# Altium PCB PCB1.PcbDoc (part 3 of 3)
Units mil, origin at the board's own origin, x right, y up, seen from the top; angles counter-clockwise.
Board outline 7874.02 x 3937.01 mil, 2 copper layers (Top Layer, Bottom Layer); 455 components, 299 nets, 1238 pads, 79 vias.
Unrouted connection lines stored in the file: 632.
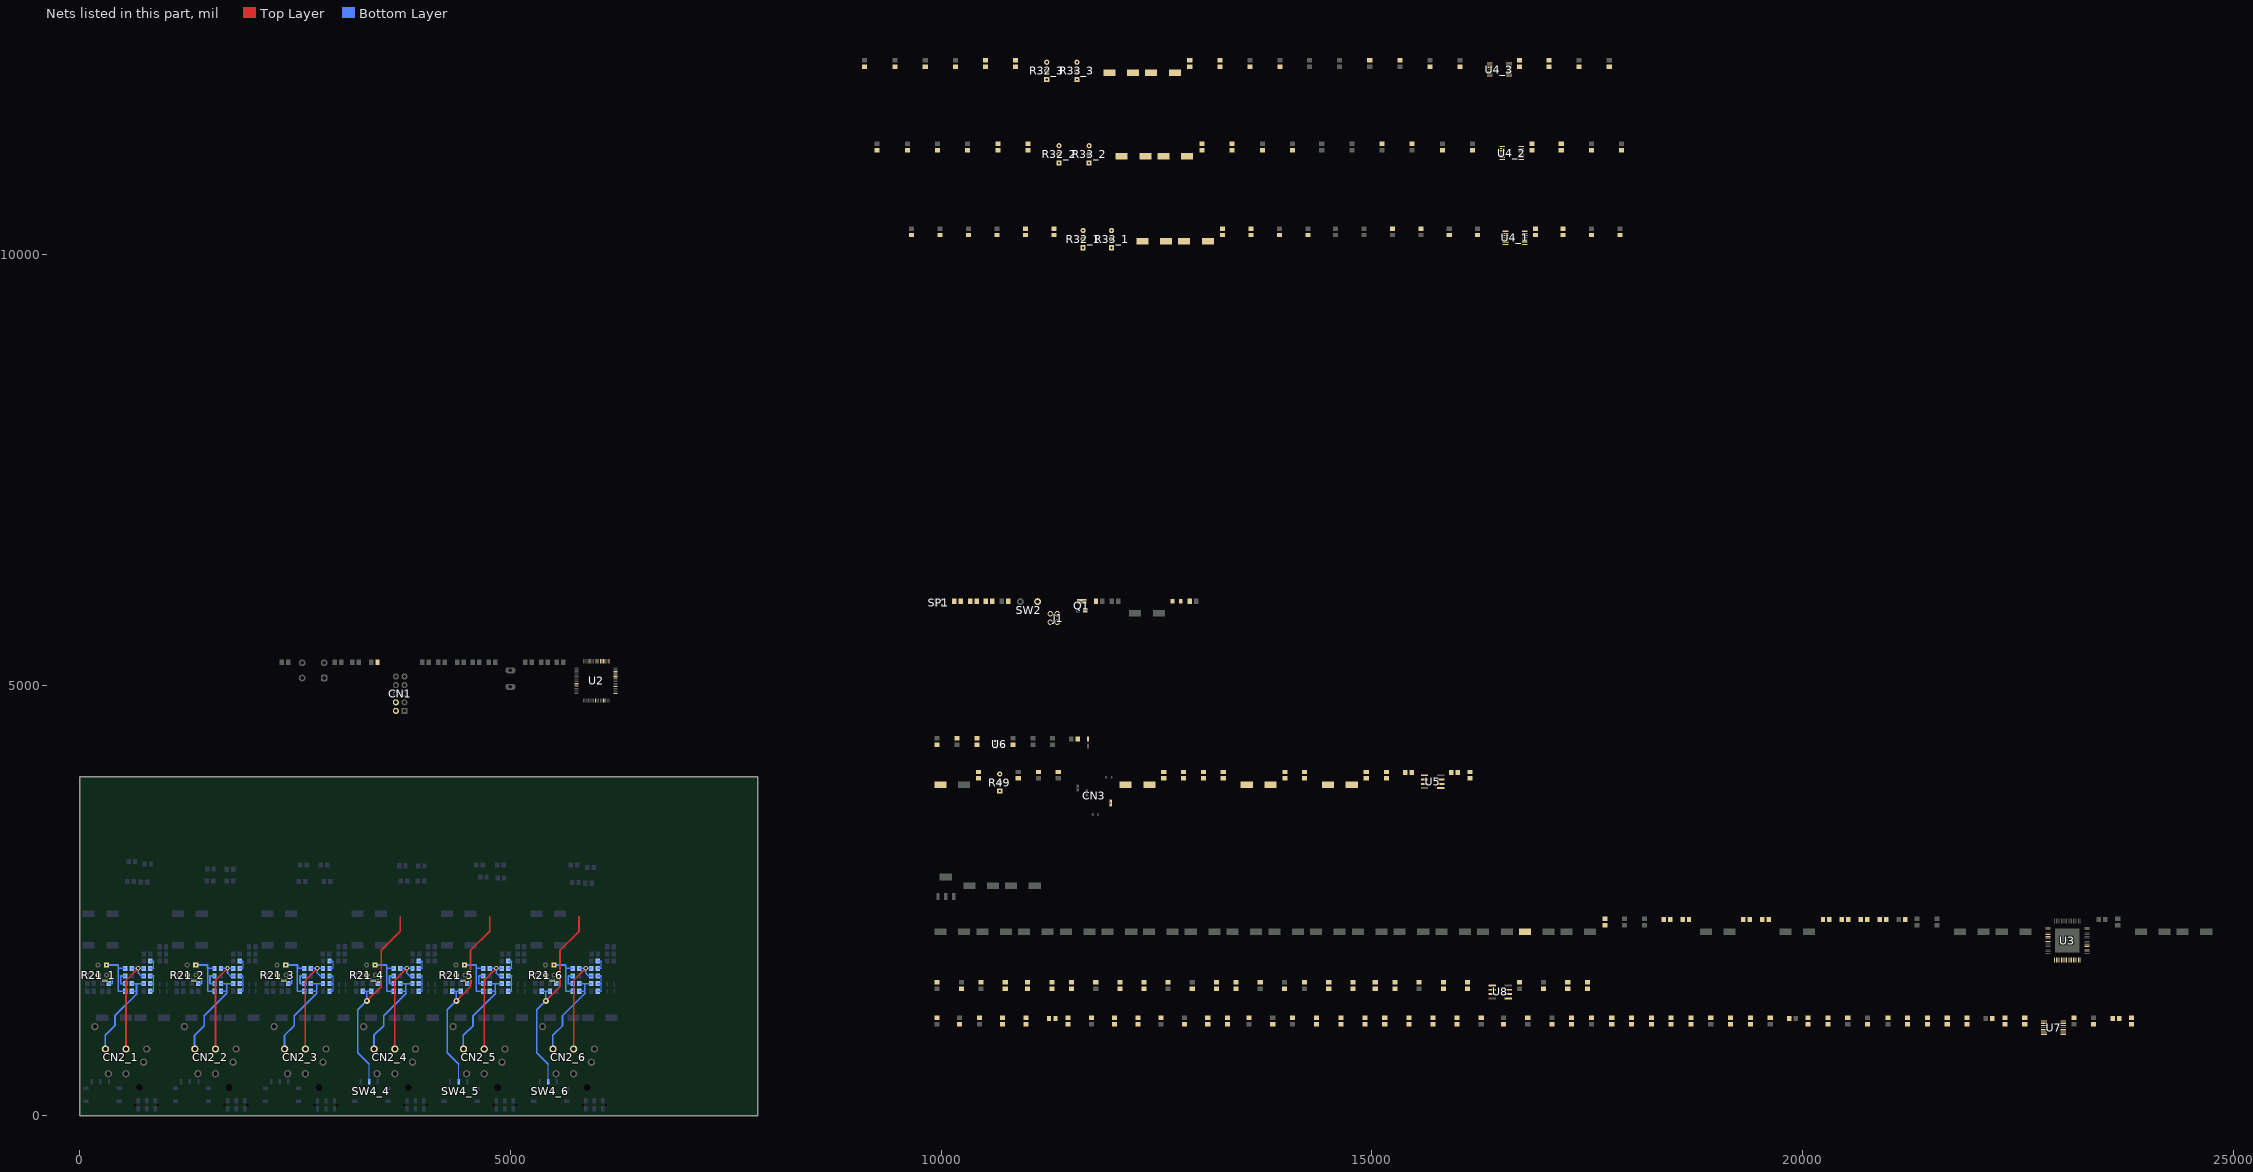
[diagram p3: the nets of this part, all layers, seen from the top]

## Via types
v1: diameter 50, hole 28, Top Layer to Bottom Layer, 69 vias
v2: diameter 70, hole 28, Top Layer to Bottom Layer, 6 vias
v3: diameter 55.12, hole 27.56, Top Layer to Bottom Layer, 4 vias

## Nets (pads, with @x,y where several pads share a name; then routed paths per layer and width w, separated by ;. In a path a pad name is that pad's centre, name@x,y a point inside that pad or via, vN(x,y) a via of type N, cw(c..) or ccw(c..) an arc to the next point about the centre after c; other vN are vias at no path point) (continued)
NetC50_4_1: C50_4.1 R22_4.1 SW4_4.2 U2.56 | length 2489.9
  Top Layer w20: v2(3333.78,1335.75) 3499.02,1500.98 3499.02,1924.21 3720.47,2145.67 3720.47,2308.07
  Bottom Layer w10: SW4_4.2@3360.63,397.64 3361.22,398.23 3361.22,600.39
  Bottom Layer w20: C50_4.1@3284.69,1446.85 3333.78,1446.85 ; 3361.22,600.39 3228.35,733.27 3228.35,1230.32 v2(3333.78,1335.75) ; R22_4.1@3382.87,1446.85 3333.78,1446.85 ; v2(3333.78,1335.75) 3333.78,1446.85 ; v2(3333.78,1335.75) 3333.78,1446.85
NetC50_5_1: C50_5.1 R22_5.1 SW4_5.2 U2.24 | length 2489.9
  Top Layer w20: v2(4372.17,1335.75) 4537.4,1500.98 4537.4,1924.21 4758.86,2145.67 4758.86,2308.07
  Bottom Layer w10: SW4_5.2@4399.02,397.64 4399.61,398.23 4399.61,600.39
  Bottom Layer w20: C50_5.1@4323.08,1446.85 4372.17,1446.85 ; 4399.61,600.39 4266.73,733.27 4266.73,1230.32 v2(4372.17,1335.75) ; R22_5.1@4421.26,1446.85 4372.17,1446.85 ; v2(4372.17,1335.75) 4372.17,1446.85 ; v2(4372.17,1335.75) 4372.17,1446.85
NetC50_6_1: C50_6.1 R22_6.1 SW4_6.2 U2.54 | length 2489.9
  Top Layer w20: v2(5410.56,1335.75) 5575.79,1500.98 5575.79,1924.21 5797.24,2145.67 5797.24,2308.07
  Bottom Layer w10: SW4_6.2@5437.4,397.64 5437.99,398.23 5437.99,600.39
  Bottom Layer w20: C50_6.1@5361.46,1446.85 5410.56,1446.85 ; 5437.99,600.39 5305.12,733.27 5305.12,1230.32 v2(5410.56,1335.75) ; R22_6.1@5459.65,1446.85 5410.56,1446.85 ; v2(5410.56,1335.75) 5410.56,1446.85 ; v2(5410.56,1335.75) 5410.56,1446.85
NetC51_1_1: C51_1.1 R26_1.1 U4_1.1
NetC51_2_1: C51_2.1 R26_2.1 U4_2.1
NetC51_3_1: C51_3.1 R26_3.1 U4_3.1
NetC52_1_1: C52_1.1 R27_1.1 U4_1.7
NetC52_2_1: C52_2.1 R27_2.1 U4_2.7
NetC52_3_1: C52_3.1 R27_3.1 U4_3.7
NetC55_1_1: C55_1.1 R36_1.1 U4_1.8
NetC55_1_2: C55_1.2 R30_1.1 R32_1.3 U4_1.9
NetC55_2_1: C55_2.1 R36_2.1 U4_2.8
NetC55_2_2: C55_2.2 R30_2.1 R32_2.3 U4_2.9
NetC55_3_1: C55_3.1 R36_3.1 U4_3.8
NetC55_3_2: C55_3.2 R30_3.1 R32_3.3 U4_3.9
NetC56_1_1: C56_1.1 R37_1.1 U4_1.14
NetC56_1_2: C56_1.2 R31_1.1 R33_1.3 U4_1.13
NetC56_2_1: C56_2.1 R37_2.1 U4_2.14
NetC56_2_2: C56_2.2 R31_2.1 R33_2.3 U4_2.13
NetC56_3_1: C56_3.1 R37_3.1 U4_3.14
NetC56_3_2: C56_3.2 R31_3.1 R33_3.3 U4_3.13
NetC57_1_1: C57_1.1 R34_1.1
NetC57_1_2: C57_1.2 R84.2
NetC57_2_1: C57_2.1 R34_2.1
NetC57_2_2: C57_2.2 R106.2
NetC57_3_1: C57_3.1 R34_3.1
NetC57_3_2: C57_3.2 R128.2
NetC58_1_1: C58_1.1 R35_1.1
NetC58_1_2: C58_1.2 R95.2
NetC58_2_1: C58_2.1 R35_2.1
NetC58_2_2: C58_2.2 R117.2
NetC58_3_1: C58_3.1 R35_3.1
NetC58_3_2: C58_3.2 R139.2
NetC61_1: C61.1 R38.2 R42.1 U5.1
NetC61_2: C61.2 R41.2 U5.2
NetC62_1: C62.1 R39.1
NetC62_2: C62.2 U3.31
NetC63_1: C63.1 R38.1 R40.2 R41.1
NetC63_2: C63.2 R44.2 R45.1 R48.2
NetC64_1: C64.1 R46.2
NetC64_2: C64.2 CN3.5
NetC65_1: C65.1 R43.1
NetC65_2: C65.2 U3.32
NetC66_1: C66.1 R45.2 U5.3
NetC67_1: C67.1 R50.1
NetC70_1: C70.1 U6.5
NetC71_1: C71.1 R78.2 R79.2 R80.1 R84.1 U7.1
NetC71_2: C71.2 R83.2 U7.2
NetC72_1: C72.1 R78.1 R82.2 R83.1
NetC72_2: C72.2 R86.2 R87.1 R88.2
NetC73_1: C73.1 R87.2 U7.3
NetC74_1: C74.1 R89.2 R90.2 R91.1 R95.1 U7.7
NetC74_2: C74.2 R94.2 U7.6
NetC75_1: C75.1 R89.1 R93.2 R94.1
NetC75_2: C75.2 R98.2 R99.1 R100.2
NetC76_1: C76.1 R96.2 R101.2 R102.1 R106.1 U7.8
NetC76_2: C76.2 R105.2 U7.9
NetC77_1: C77.1 R99.2 U7.5
NetC78_1: C78.1 R96.1 R104.2 R105.1
NetC78_2: C78.2 R108.2 R109.1 R110.2
NetC79_1: C79.1 R109.2 U7.10
NetC80_1: C80.1 R111.2 R112.2 R113.1 R117.1 U7.14
NetC80_2: C80.2 R116.2 U7.13
NetC81_1: C81.1 R111.1 R115.2 R116.1
NetC81_2: C81.2 R119.2 R120.1 R121.2
NetC82_1: C82.1 R120.2 U7.12
NetC83_1: C83.1 R122.2 R123.2 R124.1 R128.1 U8.1
NetC83_2: C83.2 R127.2 U8.2
NetC84_1: C84.1 R122.1 R126.2 R127.1
NetC84_2: C84.2 R130.2 R131.1 R132.2
NetC85_1: C85.1 R131.2 U8.3
NetC86_1: C86.1 R133.2 R134.2 R135.1 R139.1 U8.7
NetC86_2: C86.2 R138.2 U8.6
NetC87_1: C87.1 R133.1 R137.2 R138.1
NetC87_2: C87.2 R141.2 R142.1 R143.2
NetC88_1: C88.1 R142.2 U8.5
NetC89_1_1: C89_1.1 C90_1.1 CN2_1.2 R145_1.2 | length 1108.9
  Bottom Layer w20: CN2_1.2@297.8,776.28 295.28,778.8 295.28,935.04 408.46,1048.23 408.46,1161.42 659.45,1412.4 659.45,1446.85 ; R145_1.2@603.35,1446.85 659.45,1446.85 ; C89_1.1@603.35,1535.43 659.45,1535.43 ; C90_1.1@745.08,1535.43 659.45,1535.43 ; 659.45,1446.85 659.45,1535.43
NetC89_1_2: C89_1.2 R144_1.2 | length 190.9
  Bottom Layer w20: C89_1.2@528.54,1535.43 477.36,1535.43 477.36,1624.02 R144_1.2@528.54,1624.02
NetC89_2_1: C89_2.1 C90_2.1 CN2_2.2 R145_2.2 | length 1122.8
  Bottom Layer w15: 1705.71,1422.24 1705.71,1446.85 1705.71,1535.43
  Bottom Layer w20: CN2_2.2@1336.18,776.28 1333.66,778.8 1333.66,935.04 1446.85,1048.23 1446.85,1161.42 1707.68,1422.24 ; R145_2.2@1639.76,1446.85 1705.71,1446.85 ; C89_2.1@1639.76,1535.43 1705.71,1535.43 C90_2.1@1781.5,1535.43
NetC89_2_2: C89_2.2 R144_2.2 | length 190.9
  Bottom Layer w20: C89_2.2@1564.96,1535.43 1513.78,1535.43 1513.78,1624.02 R144_2.2@1564.96,1624.02
NetC89_3_1: C89_3.1 C90_3.1 CN2_3.2 R145_3.2 | length 1122.8
  Bottom Layer w15: 2749.02,1422.24 2749.02,1446.85 2749.02,1535.43
  Bottom Layer w20: CN2_3.2@2379.49,776.28 2376.97,778.8 2376.97,935.04 2490.16,1048.23 2490.16,1161.42 2750.98,1422.24 ; R145_3.2@2683.07,1446.85 2749.02,1446.85 ; C89_3.1@2683.07,1535.43 2749.02,1535.43 C90_3.1@2824.8,1535.43
NetC89_3_2: C89_3.2 R144_3.2 | length 190.9
  Bottom Layer w20: C89_3.2@2608.27,1535.43 2557.09,1535.43 2557.09,1624.02 R144_3.2@2608.27,1624.02
NetC89_4_1: C89_4.1 C90_4.1 CN2_4.2 R145_4.2 | length 1122.8
  Bottom Layer w15: 3787.4,1422.24 3787.4,1446.85 3787.4,1535.43
  Bottom Layer w20: CN2_4.2@3417.87,776.28 3415.35,778.8 3415.35,935.04 3528.54,1048.23 3528.54,1161.42 3789.37,1422.24 ; R145_4.2@3721.46,1446.85 3787.4,1446.85 ; C89_4.1@3721.46,1535.43 3787.4,1535.43 C90_4.1@3863.19,1535.43
NetC89_4_2: C89_4.2 R144_4.2 | length 190.9
  Bottom Layer w20: C89_4.2@3646.65,1535.43 3595.47,1535.43 3595.47,1624.02 R144_4.2@3646.65,1624.02
NetC89_5_1: C89_5.1 C90_5.1 CN2_5.2 R145_5.2 | length 1122.8
  Bottom Layer w15: 4825.79,1422.24 4825.79,1446.85 4825.79,1535.43
  Bottom Layer w20: CN2_5.2@4456.26,776.28 4453.74,778.8 4453.74,935.04 4566.93,1048.23 4566.93,1161.42 4827.76,1422.24 ; R145_5.2@4759.84,1446.85 4825.79,1446.85 ; C89_5.1@4759.84,1535.43 4825.79,1535.43 C90_5.1@4901.57,1535.43
NetC89_5_2: C89_5.2 R144_5.2 | length 190.9
  Bottom Layer w20: C89_5.2@4685.04,1535.43 4633.86,1535.43 4633.86,1624.02 R144_5.2@4685.04,1624.02
NetC89_6_1: C89_6.1 C90_6.1 CN2_6.2 R145_6.2 | length 1122.8
  Bottom Layer w15: 5864.17,1422.24 5864.17,1446.85 5864.17,1535.43
  Bottom Layer w20: CN2_6.2@5494.65,776.28 5492.13,778.8 5492.13,935.04 5605.32,1048.23 5605.32,1161.42 5866.14,1422.24 ; R145_6.2@5798.23,1446.85 5864.17,1446.85 ; C89_6.1@5798.23,1535.43 5864.17,1535.43 C90_6.1@5939.96,1535.43
NetC89_6_2: C89_6.2 R144_6.2 | length 190.9
  Bottom Layer w20: C89_6.2@5723.43,1535.43 5672.24,1535.43 5672.24,1624.02 R144_6.2@5723.43,1624.02
NetC90_1_2: C90_1.2 C91_1.1 C92_1.1 | length 294.6
  Bottom Layer w10: 856.3,1446.85 861.22,1451.77 861.22,1530.51 856.3,1535.43 861.22,1540.35 861.22,1619.09 856.3,1624.02
  Bottom Layer w20: C91_1.1@819.88,1446.85 856.3,1446.85 ; C90_1.2@819.88,1535.43 856.3,1535.43 ; C92_1.1@819.88,1624.02 856.3,1624.02
NetC90_2_2: C90_2.2 C91_2.1 C92_2.1 | length 294.6
  Bottom Layer w10: 1892.72,1446.85 1897.64,1451.77 1897.64,1530.51 1892.72,1535.43 1897.64,1540.35 1897.64,1619.09 1892.72,1624.02
  Bottom Layer w20: C91_2.1@1856.3,1446.85 1892.72,1446.85 ; C90_2.2@1856.3,1535.43 1892.72,1535.43 ; C92_2.1@1856.3,1624.02 1892.72,1624.02
NetC90_3_2: C90_3.2 C91_3.1 C92_3.1 | length 294.6
  Bottom Layer w10: 2936.02,1446.85 2940.94,1451.77 2940.94,1530.51 2936.02,1535.43 2940.94,1540.35 2940.94,1619.09 2936.02,1624.02
  Bottom Layer w20: C91_3.1@2899.61,1446.85 2936.02,1446.85 ; C90_3.2@2899.61,1535.43 2936.02,1535.43 ; C92_3.1@2899.61,1624.02 2936.02,1624.02
NetC90_4_2: C90_4.2 C91_4.1 C92_4.1 | length 294.6
  Bottom Layer w10: 3974.41,1446.85 3979.33,1451.77 3979.33,1530.51 3974.41,1535.43 3979.33,1540.35 3979.33,1619.09 3974.41,1624.02
  Bottom Layer w20: C91_4.1@3937.99,1446.85 3974.41,1446.85 ; C90_4.2@3937.99,1535.43 3974.41,1535.43 ; C92_4.1@3937.99,1624.02 3974.41,1624.02
NetC90_5_2: C90_5.2 C91_5.1 C92_5.1 | length 294.6
  Bottom Layer w10: 5012.8,1446.85 5017.72,1451.77 5017.72,1530.51 5012.8,1535.43 5017.72,1540.35 5017.72,1619.09 5012.8,1624.02
  Bottom Layer w20: C91_5.1@4976.38,1446.85 5012.8,1446.85 ; C90_5.2@4976.38,1535.43 5012.8,1535.43 ; C92_5.1@4976.38,1624.02 5012.8,1624.02
NetC90_6_2: C90_6.2 C91_6.1 C92_6.1 C92_6.2 C93_6.1 CN2_6.3 R146_6.1 | length 1575.4
  Top Layer w20: 5732.68,1571.26 v1(5874.02,1712.6) ; CN2_6.3@5734.65,776.28 5734.65,1571.26
  Bottom Layer w10: 6051.18,1446.85 6056.1,1451.77 6056.1,1530.51 6051.18,1535.43 6056.1,1540.35 6056.1,1619.09 6051.18,1624.02
  Bottom Layer w20: R146_6.1@5798.23,1712.6 v1(5874.02,1712.6) ; C93_6.1@5939.96,1712.6 v1(5874.02,1712.6) ; C92_6.2@5949.8,1624.02 5908.46,1624.02 5874.02,1658.46 v1(5874.02,1712.6) ; C91_6.1@6014.76,1446.85 6051.18,1446.85 ; C90_6.2@6014.76,1535.43 6051.18,1535.43 ; C92_6.1@6014.76,1624.02 6051.18,1624.02
NetC92_1_2: C92_1.2 C93_1.1 CN2_1.3 R146_1.1 | length 1280.8
  Top Layer w20: CN2_1.3@537.8,776.28 537.8,1571.26 v1(679.13,1712.6)
  Bottom Layer w20: R146_1.1@603.35,1712.6 v1(679.13,1712.6) ; C93_1.1@745.08,1712.6 v1(679.13,1712.6) ; C92_1.2@754.92,1624.02 713.58,1624.02 679.13,1658.46 v1(679.13,1712.6)
NetC92_2_2: C92_2.2 C93_2.1 CN2_2.3 R146_2.1 | length 1280.8
  Top Layer w20: 1574.21,1571.26 v1(1715.55,1712.6) ; CN2_2.3@1576.18,776.28 1576.18,1571.26
  Bottom Layer w20: R146_2.1@1639.76,1712.6 v1(1715.55,1712.6) ; C93_2.1@1781.5,1712.6 v1(1715.55,1712.6) ; C92_2.2@1791.34,1624.02 1750,1624.02 1715.55,1658.46 v1(1715.55,1712.6)
NetC92_3_2: C92_3.2 C93_3.1 CN2_3.3 R146_3.1 | length 1280.8
  Top Layer w20: 2617.52,1571.26 v1(2758.86,1712.6) ; CN2_3.3@2619.49,776.28 2619.49,1571.26
  Bottom Layer w20: R146_3.1@2683.07,1712.6 v1(2758.86,1712.6) ; C93_3.1@2824.8,1712.6 v1(2758.86,1712.6) ; C92_3.2@2834.65,1624.02 2793.31,1624.02 2758.86,1658.46 v1(2758.86,1712.6)
NetC92_4_2: C92_4.2 C93_4.1 CN2_4.3 R146_4.1 | length 1280.8
  Top Layer w20: 3655.91,1571.26 v1(3797.24,1712.6) ; CN2_4.3@3657.87,776.28 3657.87,1571.26
  Bottom Layer w20: R146_4.1@3721.46,1712.6 v1(3797.24,1712.6) ; C93_4.1@3863.19,1712.6 v1(3797.24,1712.6) ; C92_4.2@3873.03,1624.02 3831.69,1624.02 3797.24,1658.46 v1(3797.24,1712.6)
NetC92_5_2: C92_5.2 C93_5.1 CN2_5.3 R146_5.1 | length 1280.8
  Top Layer w20: 4694.29,1571.26 v1(4835.63,1712.6) ; CN2_5.3@4696.26,776.28 4696.26,1571.26
  Bottom Layer w20: R146_5.1@4759.84,1712.6 v1(4835.63,1712.6) ; C93_5.1@4901.57,1712.6 v1(4835.63,1712.6) ; C92_5.2@4911.42,1624.02 4870.08,1624.02 4835.63,1658.46 v1(4835.63,1712.6)
NetC92_6_2: 
NetC93_1_2: C93_1.2 R147_1.2 | length 160.6
  Bottom Layer w10: 856.3,1712.6 861.22,1717.52 861.22,1791.34 856.3,1796.26
  Bottom Layer w20: C93_1.2@819.88,1712.6 856.3,1712.6 ; R147_1.2@819.88,1796.26 856.3,1796.26
NetC93_2_2: C93_2.2 R147_2.2 | length 160.6
  Bottom Layer w10: 1892.72,1712.6 1897.64,1717.52 1897.64,1791.34 1892.72,1796.26
  Bottom Layer w20: C93_2.2@1856.3,1712.6 1892.72,1712.6 ; R147_2.2@1856.3,1796.26 1892.72,1796.26
NetC93_3_2: C93_3.2 R147_3.2 | length 160.6
  Bottom Layer w10: 2936.02,1712.6 2940.94,1717.52 2940.94,1791.34 2936.02,1796.26
  Bottom Layer w20: C93_3.2@2899.61,1712.6 2936.02,1712.6 ; R147_3.2@2899.61,1796.26 2936.02,1796.26
NetC93_4_2: C93_4.2 R147_4.2 | length 160.6
  Bottom Layer w10: 3974.41,1712.6 3979.33,1717.52 3979.33,1791.34 3974.41,1796.26
  Bottom Layer w20: C93_4.2@3937.99,1712.6 3974.41,1712.6 ; R147_4.2@3937.99,1796.26 3974.41,1796.26
NetC93_5_2: C93_5.2 R147_5.2 | length 160.6
  Bottom Layer w10: 5012.8,1712.6 5017.72,1717.52 5017.72,1791.34 5012.8,1796.26
  Bottom Layer w20: C93_5.2@4976.38,1712.6 5012.8,1712.6 ; R147_5.2@4976.38,1796.26 5012.8,1796.26
NetC93_6_2: C93_6.2 R147_6.2 | length 160.6
  Bottom Layer w10: 6051.18,1712.6 6056.1,1717.52 6056.1,1791.34 6051.18,1796.26
  Bottom Layer w20: C93_6.2@6014.76,1712.6 6051.18,1712.6 ; R147_6.2@6014.76,1796.26 6051.18,1796.26
NetCN1_2: CN1.2 U2.49
NetCN1_4: CN1.4 U2.46
NetD1_1: D1.1 Q1.3
NetD1_2: D1.2 R2.1
NetD2_2: D2.2 L1.2 U6.1
NetJ1_1: J1.1 SW2.1
NetJ1_2: J1.2 R5.1 SP1.2
NetJ1_3: J1.3 R6.1 SP1.3
NetJ1_4: J1.4 R7.1
NetQ1_1: Q1.1 R3.1
NetR1_2: R1.2 U2.60
NetR4_2: R4.2 U2.42
NetR5_2: R5.2 U2.44
NetR6_2: R6.2 U2.45
NetR7_2: R7.2 U2.43
NetR11_2: R11.2 U3.48
NetR12_1: R12.1 U3.35
NetR12_2: R12.2 R13.1 U2.33
NetR13_2: R13.2 U3.6
NetR14_1: R14.1 U3.36
NetR14_2: R14.2 R15.1 U2.29
NetR15_2: R15.2 U3.7
NetR16_1: R16.1 U3.41
NetR16_2: R16.2 U2.37
NetR17_1: R17.1 U2.10
NetR17_2: R17.2 U3.8
NetR18_1: R18.1 U3.37
NetR18_2: R18.2 U2.11
NetR19_1: R19.1 U2.52
NetR19_2: R19.2 U3.9
NetR20_1: R20.1 U3.38
NetR20_2: R20.2 U2.53
NetR21_1_2: R21_1.2 R23_1.1 | length 271.4
  Bottom Layer w10: R21_1.2@212.72,1633.86 261.93,1584.65 374.02,1584.65 378.94,1579.72
  Bottom Layer w15: 374.02,1535.43 378.94,1540.35 378.94,1579.72
  Bottom Layer w20: R23_1.1@337.6,1535.43 374.02,1535.43
NetR21_2_2: R21_2.2 R23_2.1 | length 271.4
  Bottom Layer w10: R21_2.2@1251.11,1633.86 1300.32,1584.65 1412.4,1584.65 1417.32,1579.72
  Bottom Layer w15: 1412.4,1535.43 1417.32,1540.35 1417.32,1579.72
  Bottom Layer w20: R23_2.1@1375.98,1535.43 1412.4,1535.43
NetR21_3_2: R21_3.2 R23_3.1 | length 271.4
  Bottom Layer w10: R21_3.2@2294.41,1633.86 2343.63,1584.65 2455.71,1584.65 2460.63,1579.72
  Bottom Layer w15: 2455.71,1535.43 2460.63,1540.35 2460.63,1579.72
  Bottom Layer w20: R23_3.1@2419.29,1535.43 2455.71,1535.43
NetR21_4_2: R21_4.2 R23_4.1 | length 271.4
  Bottom Layer w10: R21_4.2@3332.8,1633.86 3382.01,1584.65 3494.09,1584.65 3499.02,1579.72
  Bottom Layer w15: 3494.09,1535.43 3499.02,1540.35 3499.02,1579.72
  Bottom Layer w20: R23_4.1@3457.68,1535.43 3494.09,1535.43
NetR21_5_2: R21_5.2 R23_5.1 | length 271.4
  Bottom Layer w10: R21_5.2@4371.19,1633.86 4420.4,1584.65 4532.48,1584.65 4537.4,1579.72
  Bottom Layer w15: 4532.48,1535.43 4537.4,1540.35 4537.4,1579.72
  Bottom Layer w20: R23_5.1@4496.06,1535.43 4532.48,1535.43
NetR21_6_2: R21_6.2 R23_6.1 | length 271.4
  Bottom Layer w10: R21_6.2@5409.57,1633.86 5458.78,1584.65 5570.87,1584.65 5575.79,1579.72
  Bottom Layer w15: 5570.87,1535.43 5575.79,1540.35 5575.79,1579.72
  Bottom Layer w20: R23_6.1@5534.45,1535.43 5570.87,1535.43
NetR32_1_1: R32_1.1 R32_1.2 R34_1.2
NetR32_2_1: R32_2.1 R32_2.2 R34_2.2
NetR32_3_1: R32_3.1 R32_3.2 R34_3.2
NetR33_1_1: R33_1.1 R33_1.2 R35_1.2
NetR33_2_1: R33_2.1 R33_2.2 R35_2.2
NetR33_3_1: R33_3.1 R33_3.2 R35_3.2
NetR39_2: R39.2 R40.1
NetR42_2: R42.2 R47.2 U5.5
NetR43_2: R43.2 R44.1
NetR46_1: R46.1 R49.2 R49.3 U5.7
NetR49_1: R49.1 R50.2 U5.6
NetR59_2: R103.1
NetR75_1: R75.1 R76.2 U6.3
NetR76_1: R76.1 R77.2
NetR81_2: R81.2 R82.1
NetR85_2: R85.2 R86.1
NetR92_2: R92.2 R93.1
NetR97_2: R97.2 R98.1
NetR103_2: R103.2 R104.1
NetR107_2: R107.2 R108.1
NetR114_2: R114.2 R115.1
NetR118_2: R118.2 R119.1
NetR125_2: R125.2 R126.1
NetR129_2: R129.2 R130.1
NetR136_2: R136.2 R137.1
NetR140_2: R140.2 R141.1
NetR145_1_1: R145_1.1 R146_1.2 SW5_1.1 | length 597.9
  Bottom Layer w15: 447.83,1712.6 447.83,1451.77 452.76,1446.85
  Bottom Layer w20: SW5_1.1@311.61,1751.97 447.83,1751.97 447.83,1712.6 R146_1.2@526.57,1712.6 ; 452.76,1446.85 R145_1.1@528.54,1446.85
NetR145_2_1: R145_2.1 R146_2.2 SW5_2.1 | length 597.9
  Bottom Layer w15: 1484.25,1712.6 1484.25,1451.77 1489.17,1446.85
  Bottom Layer w20: SW5_2.1@1348.03,1751.97 1484.25,1751.97 1484.25,1712.6 R146_2.2@1562.99,1712.6 ; 1489.17,1446.85 R145_2.1@1564.96,1446.85
NetR145_3_1: R145_3.1 R146_3.2 SW5_3.1 | length 597.9
  Bottom Layer w15: 2527.56,1712.6 2527.56,1451.77 2532.48,1446.85
  Bottom Layer w20: SW5_3.1@2391.34,1751.97 2527.56,1751.97 2527.56,1712.6 R146_3.2@2606.3,1712.6 ; 2532.48,1446.85 R145_3.1@2608.27,1446.85
NetR145_4_1: R145_4.1 R146_4.2 SW5_4.1 | length 597.9
  Bottom Layer w15: 3565.94,1712.6 3565.94,1451.77 3570.87,1446.85
  Bottom Layer w20: SW5_4.1@3429.72,1751.97 3565.94,1751.97 3565.94,1712.6 R146_4.2@3644.69,1712.6 ; 3570.87,1446.85 R145_4.1@3646.65,1446.85
NetR145_5_1: R145_5.1 R146_5.2 SW5_5.1 | length 597.9
  Bottom Layer w15: 4604.33,1712.6 4604.33,1451.77 4609.25,1446.85
  Bottom Layer w20: SW5_5.1@4468.11,1751.97 4604.33,1751.97 4604.33,1712.6 R146_5.2@4683.07,1712.6 ; 4609.25,1446.85 R145_5.1@4685.04,1446.85
NetR145_6_1: R145_6.1 R146_6.2 SW5_6.1 | length 597.9
  Bottom Layer w15: 5642.72,1712.6 5642.72,1451.77 5647.64,1446.85
  Bottom Layer w20: SW5_6.1@5506.5,1751.97 5642.72,1751.97 5642.72,1712.6 R146_6.2@5721.46,1712.6 ; 5647.64,1446.85 R145_6.1@5723.43,1446.85
NetU3_5: U3.5
NetU3_13: U3.13
NetU3_17: U3.17
NetU3_18: U3.18
NetU3_19: U3.19
NetU3_20: U3.20
NetU3_21: U3.21
NetU3_22: U3.22
NetU3_23: U3.23
NetU3_24: U3.24
NetU3_25: U3.25
NetU3_26: U3.26
NetU3_27: U3.27
NetU3_28: U3.28
NetU3_29: U3.29
NetU3_30: U3.30
VCOMAD: C31.1 C51_1.2 C51_2.2 C51_3.2 C52_1.2 C52_2.2 C52_3.2 C59_1.1 C59_2.1 C59_3.1 C60_1.1 C60_2.1 C60_3.1 R24_1.1 R24_2.1 R24_3.1 R25_1.1 R25_2.1 R25_3.1 R28_1.2 R28_2.2 R28_3.2 R29_1.2 R29_2.2 R29_3.2 U3.1 U4_1.2 U4_1.3 U4_1.5 U4_1.6 U4_1.10 U4_1.12 U4_2.2 U4_2.3 U4_2.5 U4_2.6 U4_2.10 U4_2.12 U4_3.2 U4_3.3 U4_3.5 U4_3.6 U4_3.10 U4_3.12
pads on no net: C27.1 C27.2 CN1.3 CN2_1.Mount CN2_2.Mount CN2_3.Mount CN2_4.Mount CN2_5.Mount CN2_6.Mount CN3.3 CN3.4 SW2.3 SW2.4 SW3_1.7 SW3_1.8 SW3_2.7 SW3_2.8 SW3_3.7 SW3_3.8 SW3_4.7 SW3_4.8 SW3_5.7 SW3_5.8 SW3_6.7 SW3_6.8 SW4_1.1 SW4_1.4 SW4_1.5 SW4_1.6 SW4_1.7 SW4_2.1 SW4_2.4 SW4_2.5 SW4_2.6 SW4_2.7 SW4_3.1 SW4_3.4 SW4_3.5 SW4_3.6 SW4_3.7 SW4_4.1 SW4_4.4 SW4_4.5 SW4_4.6 SW4_4.7 SW4_5.1 SW4_5.4 SW4_5.5 SW4_5.6 SW4_5.7 SW4_6.1 SW4_6.4 SW4_6.5 SW4_6.6 SW4_6.7 U1.2 U2.2 U2.3 U2.4 U2.8 U2.9 U2.14 U2.15 U2.16 U2.17 U2.20 U2.21 U2.28 U2.34 U2.35 U2.36 U2.38 U2.39 U2.40 U2.41 U2.50 U2.51 U2.61 U2.62 U3.10

## Silkscreen, mask and mechanical layers (free items; w line width, h text height)
Mechanical 1:
  lines w5: 0,0 0,3937.01 7874.02,3937.01 7874.02,0 0,0 ; 19.68,19.68 7854.33,19.68 7854.33,3917.32 19.68,3917.32 19.68,19.68